# Altium PCB 宁波2号线PIS_LED接口板(BHC-L-1109-02)_PCB(06001589)_V1.0.PcbDoc
Units mil, origin at the board's own origin, x right, y up, seen from the top; angles counter-clockwise.
Board outline 3159.61 x 1584.8 mil, 2 copper layers (Top Layer, Bottom Layer); 5 components, 10 nets, 40 pads, 48 vias.
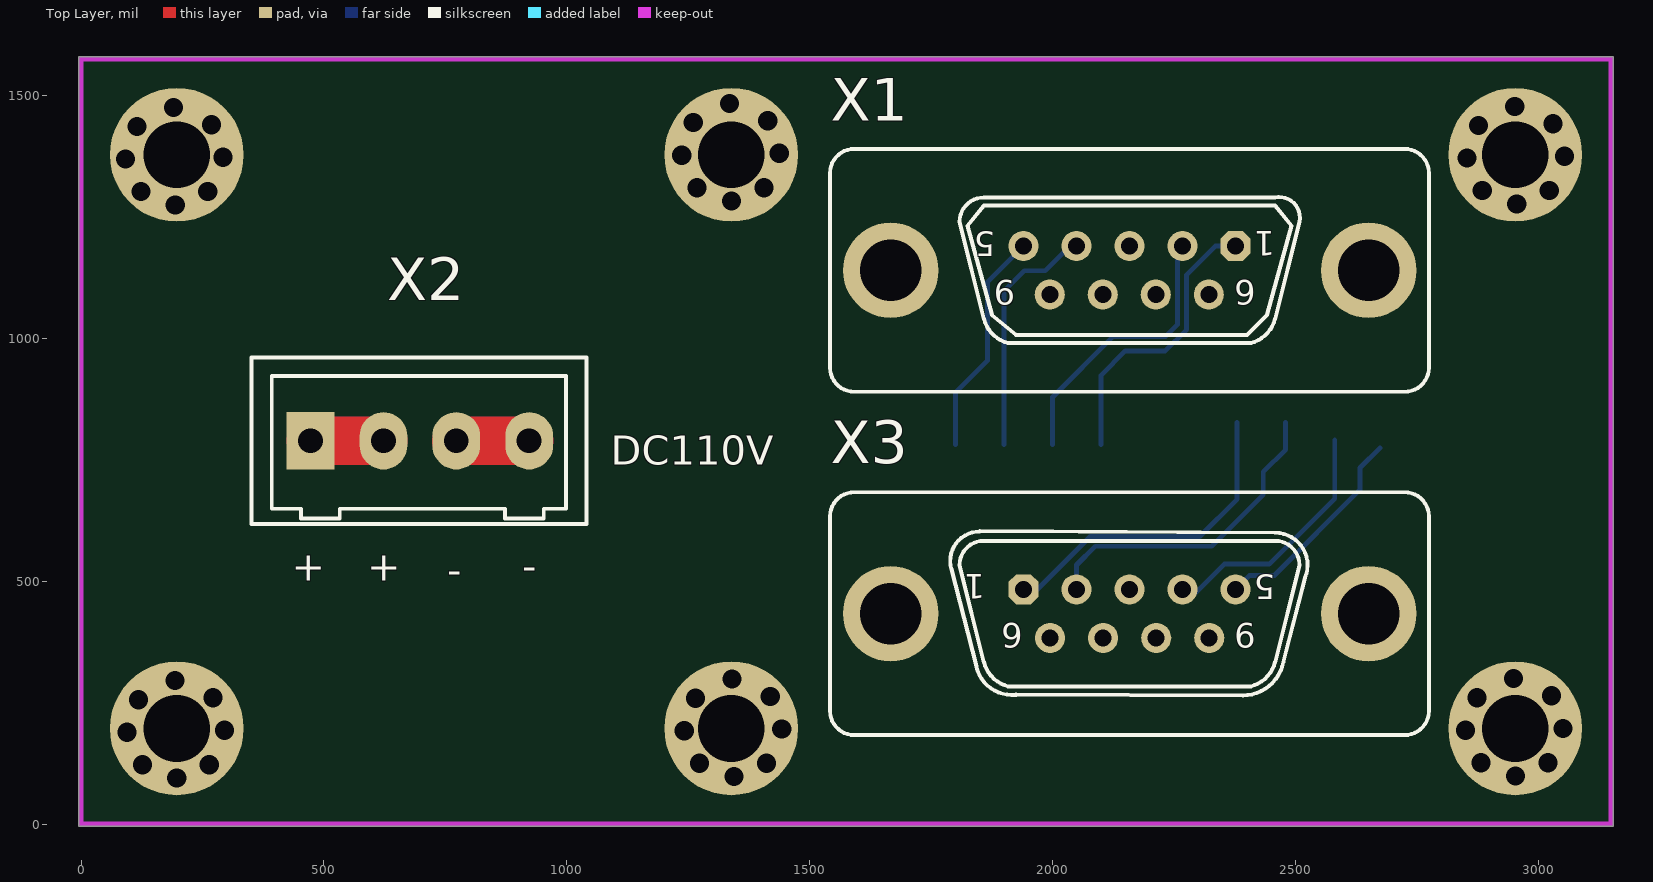
[diagram p0: Top Layer view]
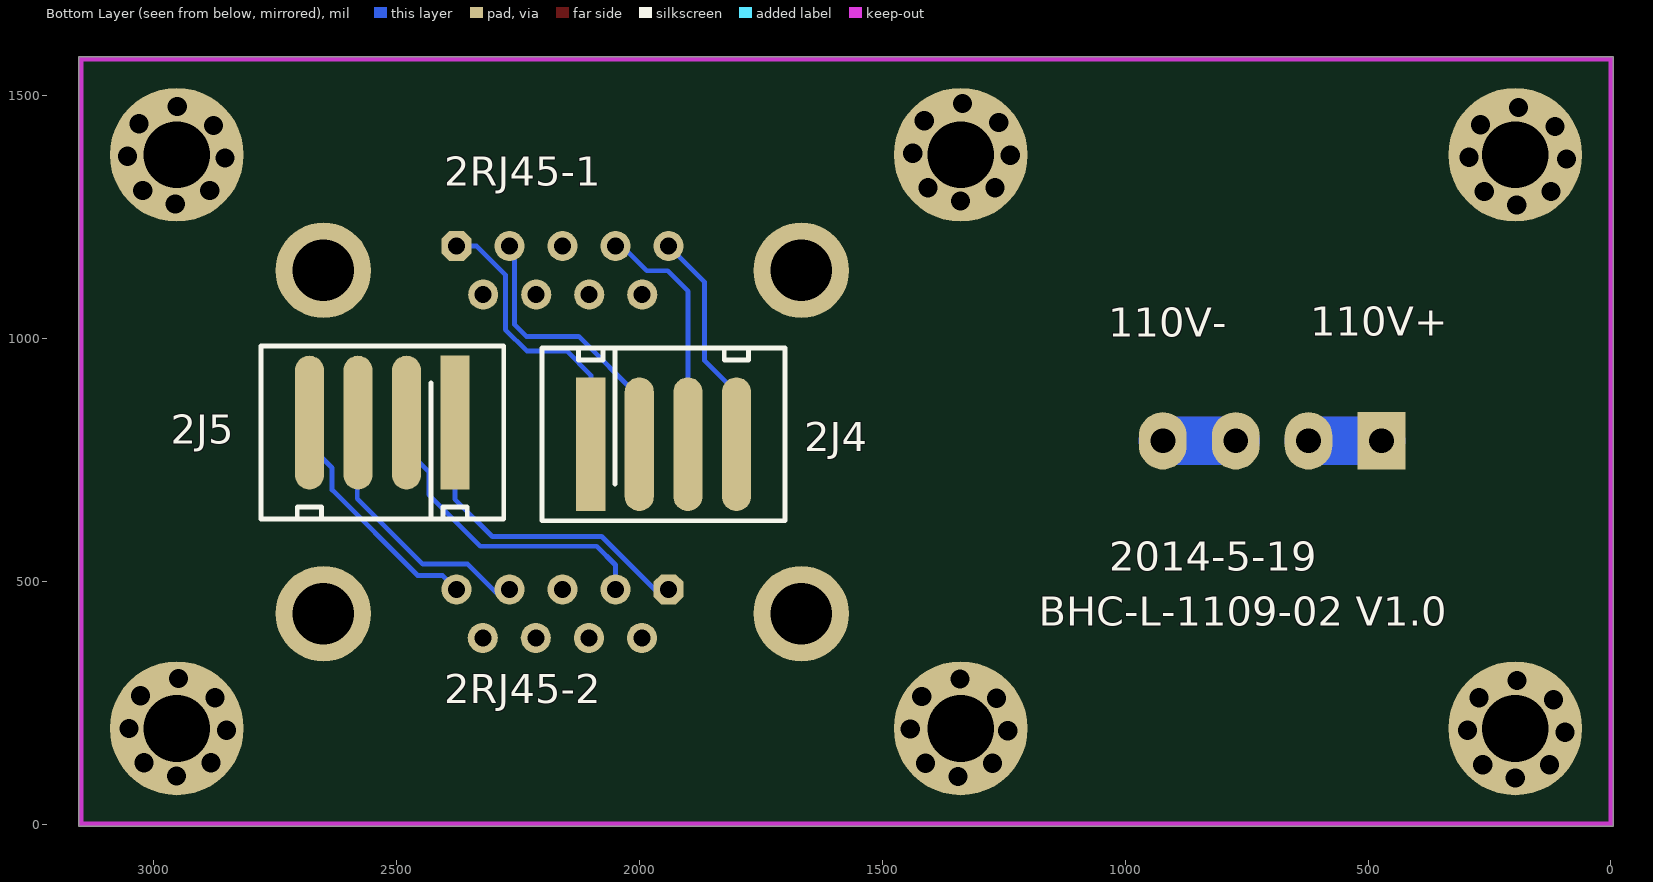
[diagram p1: Bottom Layer view, seen from below]

## Layer stack, top to bottom
Top Layer: signal copper 1.4
Dielectric: dielectric 12.6, FR-4, Dk 4.8
Bottom Layer: signal copper 1.4

## Board outline
-5,-5 3154.61,-5 3154.61,1579.8 -5,1579.8

## Design rules (kind name [scope] priority, off if disabled: settings)
Clearance [All] p1: gap=8
PolygonConnect [All] p1: connectstyle=Relief reliefconductorwidth=10 reliefentries=4 polygonreliefangle="90 Angle" airgapwidth=10
RoutingPriority [All] p1: routingpriority=4
RoutingVias [All] p1: holewidth=20 width=50 viastyle="Through Hole" minholewidth=28 minwidth=50 maxholewidth=28 maxwidth=50
SolderMaskExpansion [All] p1: expansion=4
Width [All] p1: maxlimit=200 minlimit=10 preferedwidth=20
27 further rules are at their usual default settings.

## Components (designator, comment, footprint, x,y, rotation, side; value= is the part's Value field where it differs from the comment)
2J4 "CON4" 254*4-SM 2100,880 r180 bottom
2J5 "CON4" 254*4-SM 2380,728.35 r0 bottom
X1 "" DB9FS 2376.83,1190 r180 top locked
X2 "CON4" 734-234 472.44,789 r0 top locked
X3 "" DB9SS 1940.17,483.07 r180 top locked

## Footprints (in the part's own frame and the unit in brackets; to place one, negate y for a bottom-side part, rotate by r counter-clockwise, add the part's x,y. Pads: shape width x height; smd on the part's side, far side on the other; paste and mask are expansions set on the pad)
254*4-SM [mm]
  rect 1.524x7 smd: 1(-0.01,-2.491)
  oval 1.524x7 smd: 2(2.53,-2.491) 3(5.07,-2.491) 4(7.61,-2.491)
  silkscreen extent -2.55,-6.49 10.15,2.55
734-234 [mm]
  rect 2.5x3 hole 1.3: 1(0,0)
  oval 2.5x3 hole 1.3: 2(3.81,0) 3(7.62,0) 4(11.43,0)
  silkscreen extent -3.1,-4.35 14.43,4.35
DB9FS [mil]
  oct 62x62 hole 35: 1(0,0)
  round 62 hole 35: 2(109.17,0) 3(218.33,0) 4(327.5,0) 5(436.67,0) 6(55,100) 7(164.17,100) 8(273.33,100) 9(382.5,100)
  round 196.67 hole 125.98: BO1(-274.17,50) BO2(710,50)
  silkscreen extent -398,-200 835,300
DB9SS [mil]
  oct 62x62 hole 35: 1(0,0)
  round 62 hole 35: 2(-109.17,0) 3(-218.33,0) 4(-327.5,0) 5(-436.67,0) 6(-55,100) 7(-164.17,100) 8(-273.33,100) 9(-382.5,100)
  round 196.67 hole 125.98: BO1(-710.83,50) BO2(273.33,50)
  silkscreen extent -835,-200 398,300

## Part data
2J4 2J5 X2: "Connector"
X1 X3: library part DB9

## Free pads (board coordinates)
  round 275.59 hole 137.79: 1(1338.58,1377.95) 2(196.85,1377.95) 3(196.85,196.85) 4(1338.58,196.85) 5(2952.75,1377.95) 6(2952.75,196.85)

## Via types
v1: diameter 39.37, hole 39.37, Top Layer to Bottom Layer, 48 vias

## Nets (pads, with @x,y where several pads share a name; then routed paths per layer and width w, separated by ;. In a path a pad name is that pad's centre, name@x,y a point inside that pad or via, vN(x,y) a via of type N, cw(c..) or ccw(c..) an arc to the next point about the centre after c; other vN are vias at no path point)
110V+: X2.1 X2.2 | length 300
  Top Layer w100: X2.1 X2.2
  Bottom Layer w100: X2.1 X2.2
110V-: X2.3 X2.4 | length 300
  Top Layer w100: X2.3 X2.4
  Bottom Layer w100: X2.3 X2.4
RX1+: 2J4.1 X1.1 | length 595.6
  Bottom Layer w10: 2J4.1@2100,781.57 2100,924 2150,974 2232,974 2276,1018 2276,1131 2335,1190 X1.1
RX1-: 2J4.2 X1.2 | length 733.9
  Bottom Layer w10: 2J4.2@2000,781.57 2000,879 2125,1004 2233,1004 2257,1028 2257,1179.33 X1.2 ; 2257,1030 X1.2@2257,1181.33
RX2+: 2J5.1 X3.1 | length 674.6
  Bottom Layer w10: X3.1 1969.07,483.07 2078,592 2303,592 2380,669 2J5.1@2380,826.77
RX2-: 2J5.2 X3.2 | length 662.7
  Bottom Layer w10: X3.2 2049.33,533.33 2088,572 2328,572 2434,678 2434,725 2480,771 2J5.2@2480,826.77
TX1+: 2J4.3 X1.4 | length 494.2
  Bottom Layer w10: 2J4.3@1900,781.57 1900,1097 1942,1139 1985,1139 X1.4@2039,1193
TX1-: 2J4.4 X1.5 | length 466.5
  Bottom Layer w10: 2J4.4@1800,781.57 1800,888 1866,954 1866,1115.83 X1.5
TX2+: 2J5.3 X3.4 | length 511.4
  Bottom Layer w10: X3.4@2271,476 2295,476 2354,535 2446,535 2581,670 2J5.3@2581,791
TX2-: 2J5.4 X3.5 | length 444
  Bottom Layer w10: X3.5 2405.76,512 2457,512 2633,688 2633,733 2J5.4@2674,774
pads on no net: X1.3 X1.6 X1.7 X1.8 X1.9 X1.BO1 X1.BO2 X3.3 X3.6 X3.7 X3.8 X3.9 X3.BO1 X3.BO2
copper on no net:
  other v1: 196.85,94.49 1344,97.49 2953,98.59 125.99,122.05 263.78,122.05 1273.14,125.05 1410.93,125.05 2882.14,126.15 3019.93,126.15 94.49,188.98 1241.64,191.98 295.28,192.91 2850.64,193.08 1442.43,195.91 3051.43,197.01 118.11,255.9 1265.26,258.9 271.65,259.84 2874.26,260.01 1418.8,262.84 3027.8,263.94 192.91,295.27 1340.06,298.27 2949.06,299.38 193.7,1274.49 2955.76,1276.54 1339,1282.59 122.83,1302.05 260.63,1302.05 2884.89,1304.1 3022.68,1304.1 1268.14,1310.15 1405.93,1310.15 91.34,1368.98 2853.39,1371.03 292.13,1372.91 3054.18,1374.97 1236.64,1377.08 1437.43,1381.01 114.96,1435.9 2877.02,1437.96 268.5,1439.84 3030.56,1441.9 1260.26,1444.01 1413.8,1447.94 189.76,1475.27 2951.82,1477.33 1335.06,1483.38

## Keep-outs
Keep-Out Layer:
  lines w10: 0,0 0,1574.8 3149.61,1574.8 3149.61,0 0,0

## Silkscreen, mask and mechanical layers (free items; w line width, h text height)
Top Overlay:
  text "DC110V" at 1090,740 h60
  text "-" at 908,502 h60
  text "+" at 434,501 h60
  text "+" at 589,501 h60
  text "-" at 754,494 h60
Bottom Overlay:
  text "2RJ45-1" at 2401.57,1314 h60
  text "110V+" at 619,1005 h60
  text "110V-" at 1035,1003 h60
  text "2014-5-19" at 1033,521 h60
  text "BHC-L-1109-02 V1.0" at 1178,408 h60
  text "2RJ45-2" at 2401.57,249 h60

## Text inside footprints (layer, text, board x,y; h text height)
X1: Top Overlay "1" at 2458.5,1220 h50 r180; Top Overlay "5" at 1882.2,1219.7 h50 r180; Top Overlay "6" at 2418.5,1120 h50 r180; Top Overlay "9" at 1922.8,1119.8 h50 r180
X3: Top Overlay "6" at 1938.5,413.07 h50 r180; Top Overlay "1" at 1861.9,514.37 h50 r180; Top Overlay "5" at 2458.5,513.07 h50 r180; Top Overlay "9" at 2418.5,413.07 h50 r180